# Altium PCB PCB2.PcbDoc
Units mil, origin at the board's own origin, x right, y up, seen from the top; angles counter-clockwise.
Board outline 3400 x 2185 mil, 2 copper layers (Top Layer, Bottom Layer); 32 components, 25 nets, 134 pads, 64 vias.
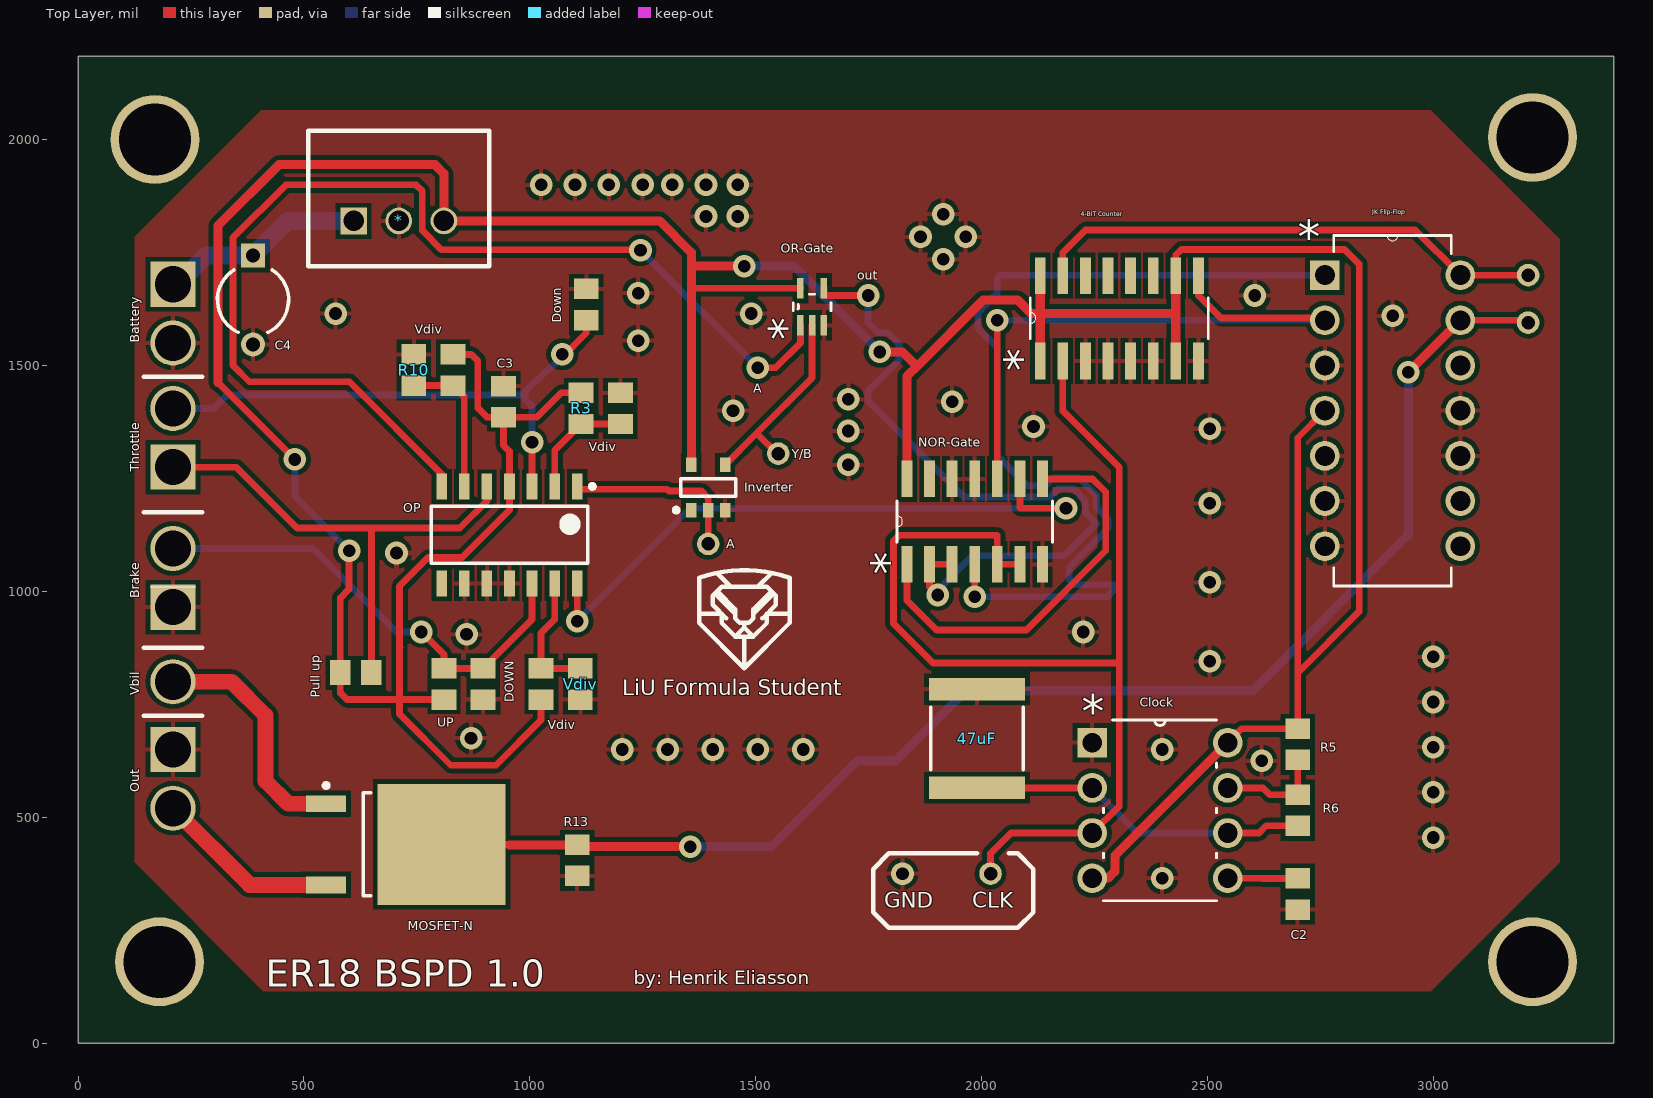
[diagram p0: Top Layer view]
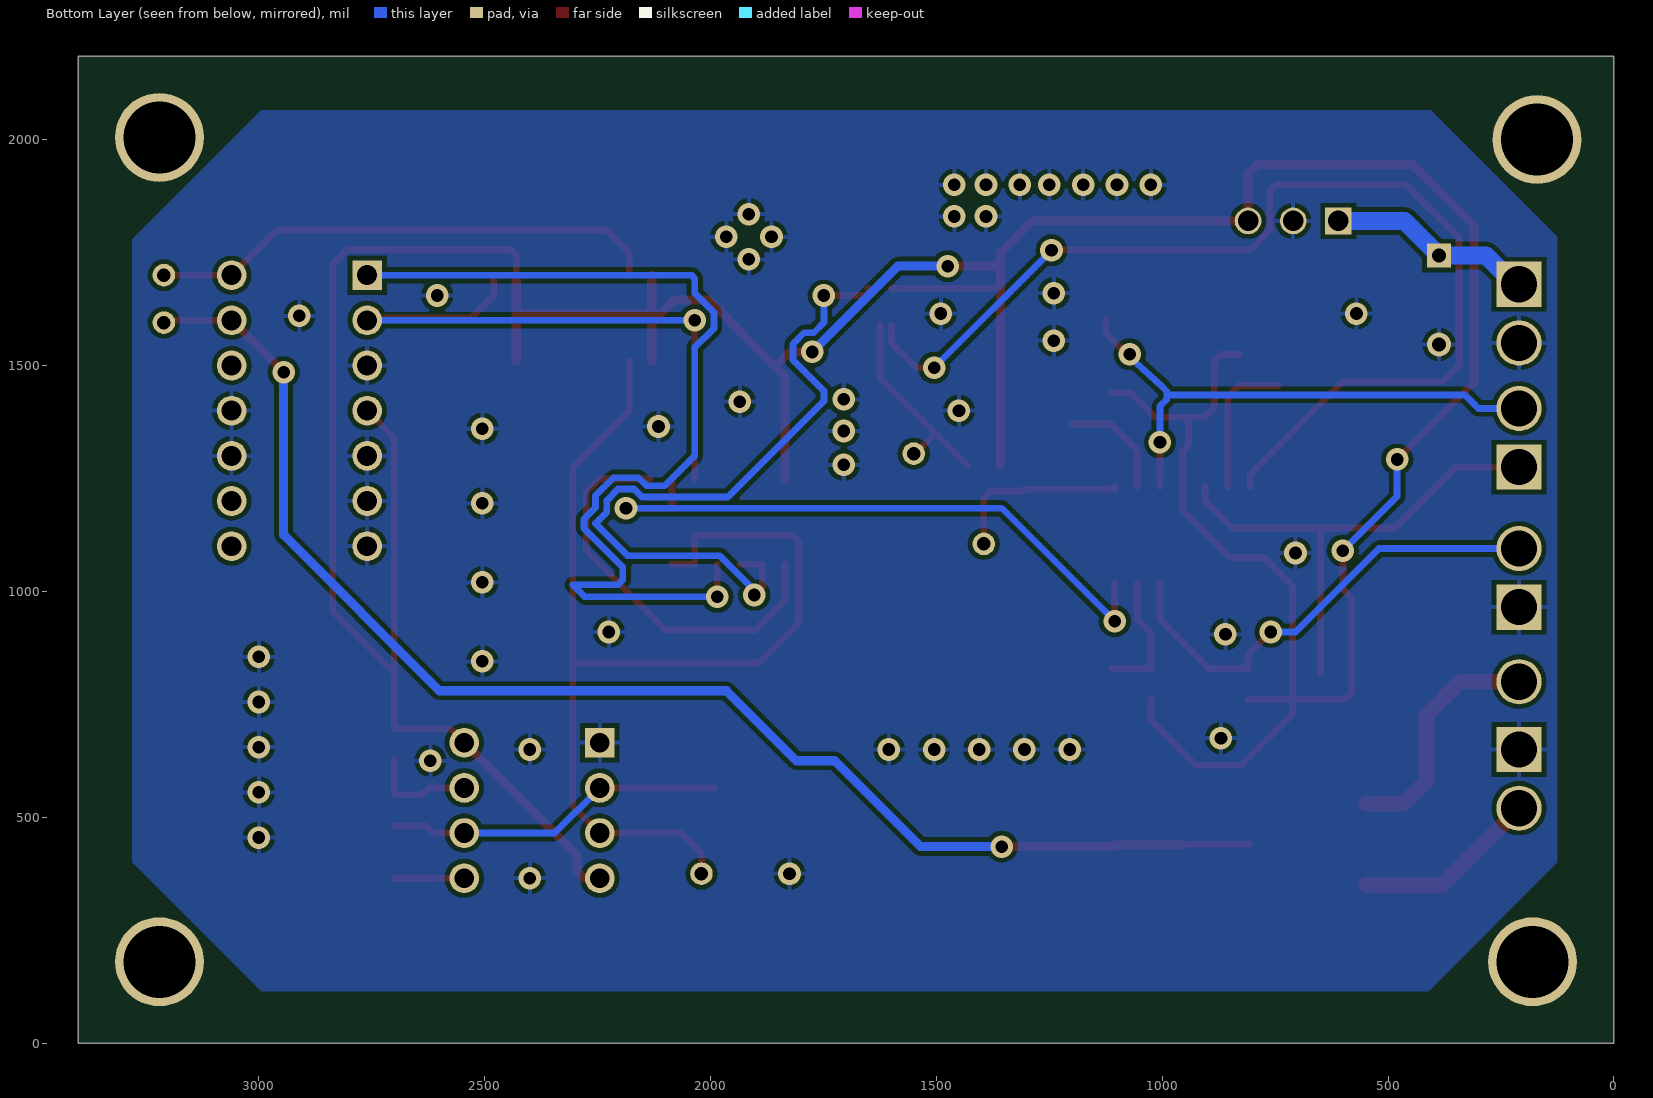
[diagram p1: Bottom Layer view, seen from below]

## Layer stack, top to bottom
Top Solder: solder mask 0.4, Solder Resist, Dk 3.5
Top Layer: signal copper 1.4
Dielectric 1: dielectric 12.6, FR-4, Dk 4.8
Bottom Layer: signal copper 1.4
Bottom Solder: solder mask 0.4, Solder Resist, Dk 3.5

## Board outline
0,0 0,2185 3400,2185 3400,0

## Design rules (kind name [scope] priority, off if disabled: settings)
Clearance [All] p1: gap=10 ignorepadtopadclearanceinfootprint=FALSE except(0: Arc-Hole Track-Hole SMDPad-Hole THPad-Hole Via-Hole Fill-Hole Poly-Hole Region-Hole Text-Hole)
DiffPairsRouting [All] p1: maxlimit=10 minlimit=10 mostfreqgap=10 toplayer_minwidth=15 toplayer_maxwidth=15 toplayer_prefwidth=15 bottomlayer_minwidth=15 bottomlayer_maxwidth=15 bottomlayer_prefwidth=15 substack1={FF4A8439-51C9-4D20-8F89-79672D8E5D7F} toplayer_{ff4a8439-51c9-4d20-8f89-79672d8e5d7f}_minwidth=15 toplayer_{ff4a8439-51c9-4d20-8f89-79672d8e5d7f}_maxwidth=15 toplayer_{ff4a8439-51c9-4d20-8f89-79672d8e5d7f}_prefwidth=15 bottomlayer_{ff4a8439-51c9-4d20-8f89-79672d8e5d7f}_minwidth=15 bottomlayer_{ff4a8439-51c9-4d20-8f89-79672d8e5d7f}_maxwidth=15 bottomlayer_{ff4a8439-51c9-4d20-8f89-79672d8e5d7f}_prefwidth=15 maxuncoupledlength=500
HoleSize [All] p1: absolutevalues=TRUE maxlimit=200 minlimit=1 maxpercent=80.000 minpercent=20.000
MinimumSolderMaskSliver [All] p1: minsoldermaskwidth=4
PolygonConnect [All] p1: connectstyle=Relief reliefconductorwidth=10 reliefentries=4 polygonreliefangle="90 Angle" airgapwidth=10
RoomDefinition BSP [InComponentClass('BSP')] p1: confinementstyle=ConfineIn formatcopy=TRUE lockcomponents=FALSE outline 0,0 3400,0 3400,2185 0,2185
RoutingVias [All] p1: holewidth=28 width=50 viastyle="Through Hole" minholewidth=28 minwidth=50 maxholewidth=28 maxwidth=50
SilkToSolderMaskClearance [IsPad] p1: minsilkscreentomaskgap=0 clearancetoexposedcopper=TRUE
SolderMaskExpansion [All] p1: expansion=4 istentingtop=FALSE
Width [All] p1: maxlimit=50 minlimit=14 preferedwidth=15 substack1={FF4A8439-51C9-4D20-8F89-79672D8E5D7F}
26 further rules are at their usual default settings.

## Classes and differential pairs
component class BSP: "4-BIT Counter" 47uF * Battery C2 C3 C4 Clock Down DOWN Inverter "JK Flip-Flop" MOSFET-N NOR-Gate OP OR-Gate OUT "Pull down" "Pull up" R3 R5 R6 R13 Throttle UP Vbil Vdiv

## Components (designator, comment, footprint, x,y, rotation, side; value= is the part's Value field where it differs from the comment)
"4-BIT Counter" "SN74ALS163BD" SOIC127P600X175-16N 2480,1699 r90 top
47uF "" C5750 1989.21,676.22 r270 top value=47uF (schematic designator C1)
* "Recom" RECOMM 710,1820 r180 top
Battery "Battery" HDR1X2#1 210,1670 r270 top (schematic designator BT1)
Brake "BSE" HDR1X2#2 210,1060 r90 top
C2 "" Resistor0805 2700,330 r90 top value=10nF
C3 "Cap" Resistor0805 941.78,1420 r270 top
C4 "Cap Pol1" CAPR5-4X5 387.31,1645 r270 top value=3.3-10uF
Clock "LM555CN" DIP254P762X533-8 2545,365 r0 top
DOWN "Pulldown" Resistor0805 896.78,795 r90 top (schematic designator R8)
Down "Pulldown" Resistor0805 1125,1635 r90 top (schematic designator R2)
Inverter "Inverter" SOT95P245X145-5N 1395,1230 r90 top (schematic designator U2)
"JK Flip-Flop" "SN74LS73AN" DIP254P762X508-14 3060,1100 r0 top
"LiU Formula Student" "Comment" LOGO 1475,980 r0 top
MOSFET-N "Kill Switch" DPAK228P998X280-3N 726.26,440 r0 top
NOR-Gate "SN74HCT02DT" SOIC127P600X175-14N 2135,1249 r90 top
OP "op" SOP127P600X175-14N 955,1125 r270 top (schematic designator U1)
OR-Gate "SN74LVC1G32DCKT" SOT65P210X110-5N 1625,1630 r90 top
Out "Header 2" HDR1X2#3 210,620 r270 top (schematic designator OUT)
"Pull up" "Pull up" Resistor0805 615,820 r0 top (schematic designator R4)
R3 "" Resistor0805 1113.69,1405 r270 top
R5 "R5" Resistor0805 2700,661.39 r90 top value=1k
R6 "" Resistor0805 2700,515.55 r90 top value=1k
R10 "" Resistor0805 743.22,1490 r90 top
R13 "Pulldown" Resistor0805 1105,404.45 r90 top
Throttle "TPS" HDR1X2H 210,1335 r90 top
UP "Pull up" Resistor0805 810,795 r90 top (schematic designator R7)
Vbil "Vbil" VCC 305,800 r0 top (schematic designator U3)
Vdiv "" Resistor0805 1111.78,795 r270 top (schematic designator R12)
Vdiv "" Resistor0805 1025,795 r90 top (schematic designator R11)
Vdiv "" Resistor0805 830,1490 r270 top (schematic designator R9)
Vdiv "" Resistor0805 1200.47,1405 r90 top (schematic designator R1)

## Footprints (in the part's own frame and the unit in brackets; to place one, negate y for a bottom-side part, rotate by r counter-clockwise, add the part's x,y. Pads: shape width x height; smd on the part's side, far side on the other; paste and mask are expansions set on the pad)
C5750 [mm] "810-C5750X7R1C476M"
  rect 1.25x5.4 smd: 1(-2.725,0.02) 2(2.825,0.02)
  silkscreen extent -1.7,-2.58 1.8,2.62, body extent -3,-2.68 3.1,2.72, height 3.1
CAPR5-4X5 [mm] "Capacitor; 2 Leads"
  rect 1.35x1.35 hole 0.8: 1(-2.5,0)
  round 1.35 hole 0.8: 2(2.5,0)
  silkscreen extent -1.69,-2 1.82,2
DIP254P762X508-14 [mil]
  rect 66x66 hole 44: 1(-300,600)
  round 66 hole 44: 2(-300,500) 3(-300,400) 4(-300,300) 5(-300,200) 6(-300,100) 7(-300,0) 8(0,0) 9(0,100) 10(0,200) 11(0,300) 12(0,400) 13(0,500) 14(0,600)
  silkscreen extent -280,-88 -20,688
DIP254P762X533-8 [mil]
  rect 66x66 hole 44: 1(-300,300)
  round 66 hole 44: 2(-300,200) 3(-300,100) 4(-300,0) 5(0,0) 6(0,100) 7(0,200) 8(0,300)
  silkscreen extent -275,-50 -25,350
DPAK228P998X280-3N [mm] "D-PAK, 3-Pads, Body 6,21x6,26mm (max), IPC Medium Density"
  rect 2.25x0.95 smd: 1(-4.5,2.28) 3(-4.5,-2.28)
  rect 7.2x6.8 smd: 2(2,0)
  silkscreen extent -4.62,-2.9 -2,3.43, body extent -2.4,-2.9 3.82,2.9, height 2.8
HDR1X2#1 [mil] "Connector; Header; 2 Position"
  rect 100x100 hole 80: 1(-10,0)
  round 100 hole 80: 2(120,0)
HDR1X2#2 [mil] "Connector; Header; 2 Position"
  rect 100x100 hole 80: 1(-95,0)
  round 100 hole 80: 2(35,0)
  silkscreen extent -50,-50 -50,50
HDR1X2#3 [mil] "Connector; Header; 2 Position"
  rect 100x100 hole 80: 1(-30,0)
  round 100 hole 80: 2(100,0)
HDR1X2H [mil] "Connector; Header; 2 Position; Right Angle"
  rect 100x100 hole 80: 1(-60,0)
  round 100 hole 80: 2(70,0)
LOGO [mil]
  silkscreen extent -100,-150 100,67
RECOMM [mm]
  rect 1.5x1.5 hole 1.15: 1(2.54,0)
  round 1.5 hole 1.15: 2(0,0) 3(-2.54,0)
  silkscreen extent -5.08,-5.08 5.08,2.54
Resistor0805 [mm] "Chip Capacitor, 2-Leads, Body 2,00x1,25mm, IPC Medium Density"
  rect 1.15x1.4 smd: 1(-0.875,0) 2(0.875,0)
  body extent -1.1,-0.67 1.1,0.67, height 0.6
SOIC127P600X175-14N [mil]
  rect 81x24 smd: 1(-189,300) 2(-189,250) 3(-189,200) 4(-189,150) 5(-189,100) 6(-189,50) 7(-189,0) 8(0,0) 9(0,50) 10(0,100) 11(0,150) 12(0,200) 13(0,250) 14(0,300)
  silkscreen extent -140,-22 -49,322
SOIC127P600X175-16N [mil]
  rect 81x24 smd: 1(-189,350) 2(-189,300) 3(-189,250) 4(-189,200) 5(-189,150) 6(-189,100) 7(-189,50) 8(-189,0) 9(0,0) 10(0,50) 11(0,100) 12(0,150) 13(0,200) 14(0,250) 15(0,300) 16(0,350)
  silkscreen extent -140,-22 -49,372
SOP127P600X175-14N [mm] "SOP, 14-Leads, Body 8,65x3,90mm, Pitch 1,27mm, IPC Medium Density"
  rect 1.45x0.6 smd: 1(-2.725,3.81) 2(-2.725,2.54) 3(-2.725,1.27) 4(-2.725,0) 5(-2.725,-1.27) 6(-2.725,-2.54) 7(-2.725,-3.81) 8(2.725,-3.81) 9(2.725,-2.54) 10(2.725,-1.27) 11(2.725,0) 12(2.725,1.27) 13(2.725,2.54) 14(2.725,3.81)
  silkscreen extent -2.85,-4.4 1.6,4.79, body extent -2,-4.4 2,4.4, height 1.75
SOT65P210X110-5N [mil]
  rect 46x14 smd: 1(-41,26) 2(-41,0) 3(-41,-26) 4(41,-26) 5(41,26)
  silkscreen extent -9,-42 28,42
SOT95P245X145-5N [mm] "SOT23, 5-Leads, Body 2,90x2,45mm, Pitch 0,95mm, IPC Medium Density"
  rect 0.8x0.6 smd: 1(-1.275,0.95) 2(-1.275,0) 3(-1.275,-0.95) 4(1.275,-0.95) 5(1.275,0.95)
  silkscreen extent -1.4,-1.55 0.5,1.92, body extent -0.88,-1.52 0.87,1.53, height 1.45
VCC [mil]
  round 100 hole 80: 1(-95,0)

## Part data
"4-BIT Counter": "Counter Single 4-Bit Sync Binary UP 16-Pin SOIC Tube", Package="SOIC-16 Texas Instruments", Availability=Good, MF="Texas Instruments", MP=SN74ALS163BD, Price="0.74 USD"
47uF C2: library part Cap, "Capacitor", LatestRevisionDate=17-Jul-2002, LatestRevisionNote="Re-released for DXP Platform.", PackageDescription="Radial Cap, Thru-Hole; 2 Leads; 0.3 in Pin Spacing", PackageReference=RAD-0.3, Published=8-Jun-2000, Publisher="Altium Limited"
* Inverter: library part Component_1
Battery: "Multicell Battery", LatestRevisionDate=17-Jul-2002, LatestRevisionNote="Re-released for DXP Platform.", PackageDescription="Battery; 2 Leads", PackageReference=BAT-2, Published=24-Mar-1999, Publisher="Altium Limited"
Brake: library part "Header 2", "Header, 2-Pin", LatestRevisionDate=17-Jul-2002, LatestRevisionNote="Re-released for DXP Platform.", Publisher="Altium Limited"
C3: "Capacitor", LatestRevisionDate=17-Jul-2002, LatestRevisionNote="Re-released for DXP Platform.", PackageDescription="Radial Cap, Thru-Hole; 2 Leads; 0.3 in Pin Spacing", PackageReference=RAD-0.3, Published=8-Jun-2000, Publisher="Altium Limited"
C4: "Polarized Capacitor (Radial)", LatestRevisionDate=17-Jul-2002, LatestRevisionNote="Re-released for DXP Platform.", PackageDescription="Polarized Capacitor (Radial); 2 Leads", PackageReference=RB7.6-15, Published=8-Jun-2000, Publisher="Altium Limited"
Clock: "Highly stable 555 timer for generating accurate time delays and oscillation 8-PDIP 0 to 70", Package="DIP-8 Texas Instruments", Availability=Good, MF="Texas Instruments", MP=LM555CN/NOPB, Price="0.72 USD"
DOWN Down "Pull up" R3 R10 R13 UP Vdiv Vdiv Vdiv Vdiv: library part Res3, "Resistor", LatestRevisionDate=29-May-2009, LatestRevisionNote="IPC-7351 Footprint Added.", PackageDescription="Chip Resistor", PackageReference=J1-0603, Published=8-Jun-2000, Publisher="Altium Limited"
"JK Flip-Flop": "Flip Flop JK-Master-Slave Type Neg-Edge 2-Element 14-Pin PDIP Tube", Package="PDIP-14 Texas Instruments", Availability=Good, MF="Texas Instruments", MP=SN74LS73AN, Price="1.37 USD"
MOSFET-N: library part MOSFET-N, "N-Channel MOSFET", LatestRevisionDate=17-Jul-2002, LatestRevisionNote="Re-released for DXP Platform.", PackageDescription="TO, Flat Index; 3 In-Line, Axial Leads; Body Dia. 4.6mm; Lead Dia. 0.5 mm (max)", PackageReference=E3, PackageVersion=1995/1996, Published=8-Jun-2000, Publisher="Altium Limited"
NOR-Gate: "Quadruple 2-Input Positive-NO Gates 14-SOIC -40 to 85", Package="SOIC-14 Texas Instruments", Availability=Good, MF="Texas Instruments", MP=SN74HCT02DT, Price="0.42 USD"
OP: "OPA4196"
OR-Gate: "Single 2-Input Positive-O Gate 5-SC70 -40 to 125", Package="SC-70-5 Texas Instruments", Availability=Good, MF="Texas Instruments", MP=SN74LVC1G32DCKT, Price="0.46 USD"
Out: "Header, 2-Pin", LatestRevisionDate=17-Jul-2002, LatestRevisionNote="Re-released for DXP Platform.", Publisher="Altium Limited"
R5 R6: library part Res1, "Resistor", LatestRevisionDate=17-Jul-2002, LatestRevisionNote="Re-released for DXP Platform.", PackageDescription="Axial Device, Thru-Hole; 2 Leads; 0.3 in Pin Spacing", PackageReference=AXIAL-0.3, Published=8-Jun-2000, Publisher="Altium Limited"
Throttle: library part "Header 2H", "Header, 2-Pin, Right Angle", LatestRevisionDate=17-Jul-2002, LatestRevisionNote="Re-released for DXP Platform.", Publisher="Altium Limited"

## Free pads (board coordinates)
  round 50 hole 30: 37(3210,1700) 38(3210,1595) 55(1395,1105) 56(1550,1305) 57(2020,375)
  round 196.85 hole 159.45: ""(170,2000) ""(180,180) ""(3220,180) ""(3220,2005)

## Via types
v1: diameter 50, hole 28, Top Layer to Bottom Layer, 64 vias

## Nets (pads, with @x,y where several pads share a name; then routed paths per layer and width w, separated by ;. In a path a pad name is that pad's centre, name@x,y a point inside that pad or via, vN(x,y) a via of type N, cw(c..) or ccw(c..) an arc to the next point about the centre after c; other vN are vias at no path point)
5V: "4-BIT Counter.1" "4-BIT Counter.7" "4-BIT Counter.10" "4-BIT Counter.16" "JK Flip-Flop.4" "Pull up.1" *.3 C3.2 Clock.4 Clock.8 Inverter.5 NOR-Gate.14 OP.4 OR-Gate.5 R3.1 R5.2 UP.1 Vdiv.1@830,1524.45 Vdiv.1@1025,760.55 | length 9686.6
  Top Layer w15: 310,1462.03 v1(480,1292.03) ; v1(600,1090) 600,1005 580.55,985.55 580.55,820 580.55,775 595,760.55 711.5,760.55 ; 712.5,876 711.5,875 ; UP.1 711.5,760.55 ; Vdiv.1@830,1524.45 870.55,1524.45 885,1510 885,1406.1 905.55,1385.55 C3.2 ; Vdiv.1@1025,760.55 1025,715 925,615 825,615 711.5,728.5 711.5,760.55 ; R3.1 1069.45,1439.45 1015.55,1385.55 C3.2 ; 1357.6,1629.6 1358,1630 ; 1357.6,1670 1358.6,1671 OR-Gate.5 ; 1835,1475 1835,1476 ; 1854,1501 1860,1501 ; 2430,1699 2430,1744.5 2442.5,1757 2804,1757 2836,1725 2836,955 2700,819 ; Clock.8 2575.84,695.84 R5.2 2700,819 ; 2760,1400 2700,1340 2700,819 ; 711.5,760.55 711.5,875 ; 711.5,875 711.5,1011.5 775,1075 850,1075 955,1180 OP.4 955,1310 941.78,1323.22 C3.2
  Top Layer w20: 310,1462.03 310,1810 445,1945 790,1945 810,1925 *.3 1287.6,1820 1357.6,1750 1357.6,1720 ; Inverter.5 1357.6,1629.6 1357.6,1670 1357.6,1720 ; v1(1475,1720) 1357.6,1720 ; v1(1775,1530) 1825,1530 1854,1501 ; NOR-Gate.14 1835,1475 ; 1835,1476 1860,1501 2004,1645 2080,1645 2110,1615 2130,1615 ; 2130,1510 2130,1615 ; 2130,1699 2130,1615 ; Clock.4 2280,365 2295,380 2295,415 Clock.8 ; 2430,1510 2430,1615 ; 2430,1699 2430,1615 ; 2130,1615 2430,1615
  Bottom Layer w15: v1(480,1292.03) 480,1210 v1(600,1090)
  Bottom Layer w20: v1(1475,1720) 1585,1720 v1(1775,1530)
GND: 47uF.1 "4-BIT Counter.3" "4-BIT Counter.4" "4-BIT Counter.5" "4-BIT Counter.6" "4-BIT Counter.8" "JK Flip-Flop.3" "JK Flip-Flop.5" "JK Flip-Flop.6" "JK Flip-Flop.7" "JK Flip-Flop.10" "JK Flip-Flop.11" *.2 Battery.2 Brake.1 C2.1 C3.1 C4.2 Clock.1 DOWN.1 Down.2 Inverter.3 NOR-Gate.7 NOR-Gate.11 NOR-Gate.12 OP.9 OP.10 OP.11 OR-Gate.3 Out.1 R10.2 R13.1 Vdiv.2@1111.78,760.55 Vdiv.2@1200.47,1439.45
  other v1: 2400,365 1825,375 3000,455 3000,555 2620,625 1205,650 1305,650 1405,650 1505,650 1605,650 2400,650 3000,655 870,675 3000,755 2505,845 3000,855 860,905 2225,910 2505,1020 705,1085 2505,1195 1705,1280 1705,1355 2505,1360 2115,1365 1450,1400 1935,1420 1705,1425 1240,1555 2910,1610 570,1615 1490,1615 2605,1655 1240,1660 1915,1735 1865,1785 1965,1785 1390,1830 1460,1830 1915,1835 1025,1900 1100,1900 1175,1900 1250,1900 1315,1900 1390,1900 1460,1900
"Net4-BIT Counter_2": "4-BIT Counter.2" Clock.3 NOR-Gate.5 NOR-Gate.6 pad.57 | length 2479.6
  Top Layer w15: pad.57 2020,420 2065,465 Clock.3 2305,525 2305,845 ; NOR-Gate.6 NOR-Gate.5 2035,1124 1817.5,1124 1805,1111.5 1805,929 1892.5,841.5 2301.5,841.5 2305,845 ; 2180,1510 2180,1399 2305,1274 2305,845
"Net4-BIT Counter_9": "4-BIT Counter.9" "JK Flip-Flop.2" NOR-Gate.10 | length 1422.8
  Top Layer w15: NOR-Gate.10 v1(2035,1600) ; 2480,1699 2480,1655 2530,1605 2755,1605 2760,1600
  Bottom Layer w15: v1(2035,1600) 2760,1600
"Net4-BIT Counter_15": "4-BIT Counter.15" "JK Flip-Flop.14" pad.37 | length 1143.1
  Top Layer w15: 2180,1699 2180,1750 2230,1800 2960,1800 3060,1700 pad.37
Net*_1: *.1 Battery.1 C4.1 | length 455.1
  Bottom Layer w40: Battery.1@215,1675 283.43,1743.43 C4.1 463.89,1820 *.1
NetBrake_2: Brake.2 DOWN.2 OP.12 UP.2 | length 1052.8
  Top Layer w15: v1(760,910) 810,860 UP.2 DOWN.2 1005,937.67 OP.12
  Bottom Layer w15: Brake.2 520,1095 705,910 v1(760,910) v1@765,910
NetC1_2: 47uF.2 Clock.2 Clock.6 R6.1 | length 758.1
  Top Layer w15: 47uF.2 Clock.2 ; Clock.6 2614,465 2630.1,481.1 R6.1
  Bottom Layer w15: Clock.2 2345,465 Clock.6
NetC2_2: C2.2 Clock.5 | length 155.2
  Top Layer w15: Clock.5 2622,365 2622.55,364.45 C2.2
NetClock_7: Clock.7 R5.1 R6.2 | length 238.2
  Top Layer w15: Clock.7 2623,565 2638,550 R6.2 R5.1
"NetJK Flip-Flop_1": "JK Flip-Flop.1" NOR-Gate.4 | length 2176.5
  Top Layer w15: v1(1985,988) NOR-Gate.4
  Bottom Layer w15: v1(1985,988) 2278,988 2304.5,1014.5 2205,1014.5 2194.36,1025.14 2194.36,1054 2280,1139.64 2280,1160.36 2254.5,1185.86 2254.5,1211.96 2214.96,1251.5 2159.04,1251.5 2141.54,1234 2101,1234 2035,1300 2035,1539.9 1992.5,1582.4 1992.5,1617.6 2035,1660.1 2035,1693 2042,1700 2760,1700
"NetJK Flip-Flop_13": "JK Flip-Flop.13" MOSFET-N.2 pad.38 R13.2 | length 3102.6
  Top Layer w15: MOSFET-N.2 954,440 955.1,438.9 ; R13.2 R13.2@1108.9,435 ; 3060,1600 3205,1600 pad.38
  Top Layer w20: 955.1,438.9 R13.2 ; R13.2@1108.9,435 v1(1355,435) ; v1(2945,1485) 3060,1600
  Bottom Layer w20: v1(1355,435) 1535,435 1725,625 1810,625 1965,780 2600,780 2945,1125 v1(2945,1485)
NetMOSFET-N_3: MOSFET-N.3 Out.2 | length 409.4
  Top Layer w35: Out.2 379.76,350.24 MOSFET-N.3
NetNOR-Gate_1: NOR-Gate.1 NOR-Gate.8 | length 901.8
  Top Layer w15: NOR-Gate.1 1835,980 1900.5,914.5 2099.5,914.5 2275,1090 2275,1220 2246,1249 NOR-Gate.8
NetNOR-Gate_2: NOR-Gate.2 NOR-Gate.3 OR-Gate.4 | length 1614
  Top Layer w15: OR-Gate.4 1651,1655 v1(1749,1655) ; v1(1903,992) 1885,1010 NOR-Gate.2 NOR-Gate.3
  Bottom Layer w15: v1(1749,1655) 1749,1594.89 1771.39,1572.5 1792.6,1572.5 1817.5,1547.6 1817.5,1512.4 1749,1443.9 1749,1421 1961,1209 2151.9,1209 2169.4,1226.5 2204.6,1226.5 2229.5,1201.6 2229.5,1175.5 2255,1150 2184,1079 1980,1079 1903,1002 v1(1903,992)
NetNOR-Gate_9: NOR-Gate.9 OP.14 | length 1435.7
  Top Layer w15: v1(1105,934) OP.14 ; NOR-Gate.9 2085,1185 2086,1184 v1(2187,1184)
  Bottom Layer w15: v1(1105,934) 1355,1184 v1(2187,1184)
NetOR-Gate_1: OP.7 OR-Gate.1 | length 2455.7
  Top Layer w15: OP.7 805,1260 601,1464 379,1464 343,1500 343,1783 460,1900 748,1900 762,1886 762,1799 805,1756 v1@1244,1756 ; v1(1505,1495) 1544,1495 1599,1550 OR-Gate.1
  Bottom Layer w15: v1(1245,1755) v1(1505,1495)
NetOR-Gate_2: Inverter.4 OR-Gate.2 pad.56 | length 455
  Top Layer w15: Inverter.4 1502.21,1350 ; pad.56 1547.21,1305 1502.21,1350 ; OR-Gate.2 1625,1472.79 1502.21,1350
NetR1_1: OP.2 R3.2 Vdiv.1@1200.47,1370.55 | length 249.4
  Top Layer w15: OP.2 1055,1311.86 R3.2 Vdiv.1@1200.47,1370.55
NetR2_1: Down.1 OP.3 Throttle.2 | length 1224.7
  Top Layer w15: OP.3 v1(1005,1330) ; v1@1072,1519 1125,1572 Down.1
  Bottom Layer w15: Throttle.2 300,1405 330,1435 990,1435 ; v1(1005,1330) 1005,1410 990,1425 990,1435 ; v1@1072,1519 1002.14,1455.13 1002,1455 990,1443 990,1435
  other v1: 1072,1525
NetR4_2: "Pull up.2" OP.5 Throttle.1 | length 1128.1
  Top Layer w15: Throttle.1 350,1275 485,1140 649.45,1140 ; 649.45,820 649.45,1140 ; OP.5 905,1200 845,1140 649.45,1140
NetR9_2: OP.6 R10.1 Vdiv.2@830,1455.55 | length 320.4
  Top Layer w15: R10.1 830,1455.55 855,1430.55 OP.6
NetR11_2: OP.13 Vdiv.1@1111.78,829.45 Vdiv.2@1025,829.45 | length 287.5
  Top Layer w15: OP.13 1055,938 1025,908 1025,829.45 Vdiv.1@1111.78,829.45
NetU1_1: Inverter.2 OP.1 pad.55 | length 406
  Top Layer w15: OP.1 1105,1226.25 1303.29,1226.25 1307.59,1221.95 1380,1221.95 1395,1206.95 Inverter.2 pad.55
VCC: MOSFET-N.1 Vbil.1 | length 536
  Top Layer w35: Vbil.1 340,800 415,725 415,580 465.24,529.76 MOSFET-N.1
pads on no net: "4-BIT Counter.11" "4-BIT Counter.12" "4-BIT Counter.13" "4-BIT Counter.14" "JK Flip-Flop.8" "JK Flip-Flop.9" "JK Flip-Flop.12" Inverter.1 NOR-Gate.13 OP.8

## Polygon pours and split planes (outlines as drawn)
GND on Bottom Layer "GND_L02_P002" (solid, pour order 2): 125,400 125,1785 405,2065 2995,2065 3280,1780 3280,400 2995,115 410,115
GND on Top Layer "GND_L01_P006" (solid, pour order 6): 125,400 125,1785 405,2065 2995,2065 3280,1780 3280,400 2995,115 410,115

## Silkscreen, mask and mechanical layers (free items; w line width, h text height)
Top Overlay:
  lines w10: 145,725 275,725 ; 145,875 275,875 ; 145,1175 275,1175 ; 145,1475 275,1475 ; 1990,420 1795,420 1760,385 1760,290 1795,255 2080,255 2115,290 2115,385 2080,420 2060,420
  text "out" at 1725,1690 h20
  text "A" at 1495,1440 h20
  text "Y/B" at 1580,1295 h20
  text "A" at 1435,1095 h20
  text "GND" at 1785,300 h35
  text "CLK" at 1980,300 h35
  text "by: Henrik Eliasson" at 1230,130 h30
  text "ER18 BSPD 1.0" at 415,125 h60
Mechanical 1:
  the board outline again, w10

## Text inside footprints (layer, text, board x,y; h text height)
"4-BIT Counter": Top Overlay "*" at 2122.46,1486.78 h73.82 r90; Mechanical 1 "*" at 2122.54,1486.83 h73.82 r90
Clock: Top Overlay "*" at 2221.65,699.53 h73.82; Mechanical 1 "*" at 2221.52,699.67 h73.82
"JK Flip-Flop": Top Overlay "*" at 2700,1750 h73.82; Mechanical 1 "*" at 2736.69,1734.78 h73.82
NOR-Gate: Top Overlay "*" at 1827.39,1036.7 h73.82 r90; Mechanical 1 "*" at 1827.1,1036.51 h73.82 r90
OR-Gate: Top Overlay "*" at 1600.81,1555.93 h73.82 r90; Mechanical 1 "*" at 1600.8,1555.92 h73.82 r90